# Altium PCB flying_spirit.PcbDoc
Units mm, origin at the board's own origin, x right, y up, seen from the top; angles counter-clockwise.
Board outline 97.88 x 97.88 mm, 2 copper layers (Top Layer, Bottom Layer); 70 components, 47 nets, 243 pads, 79 vias.
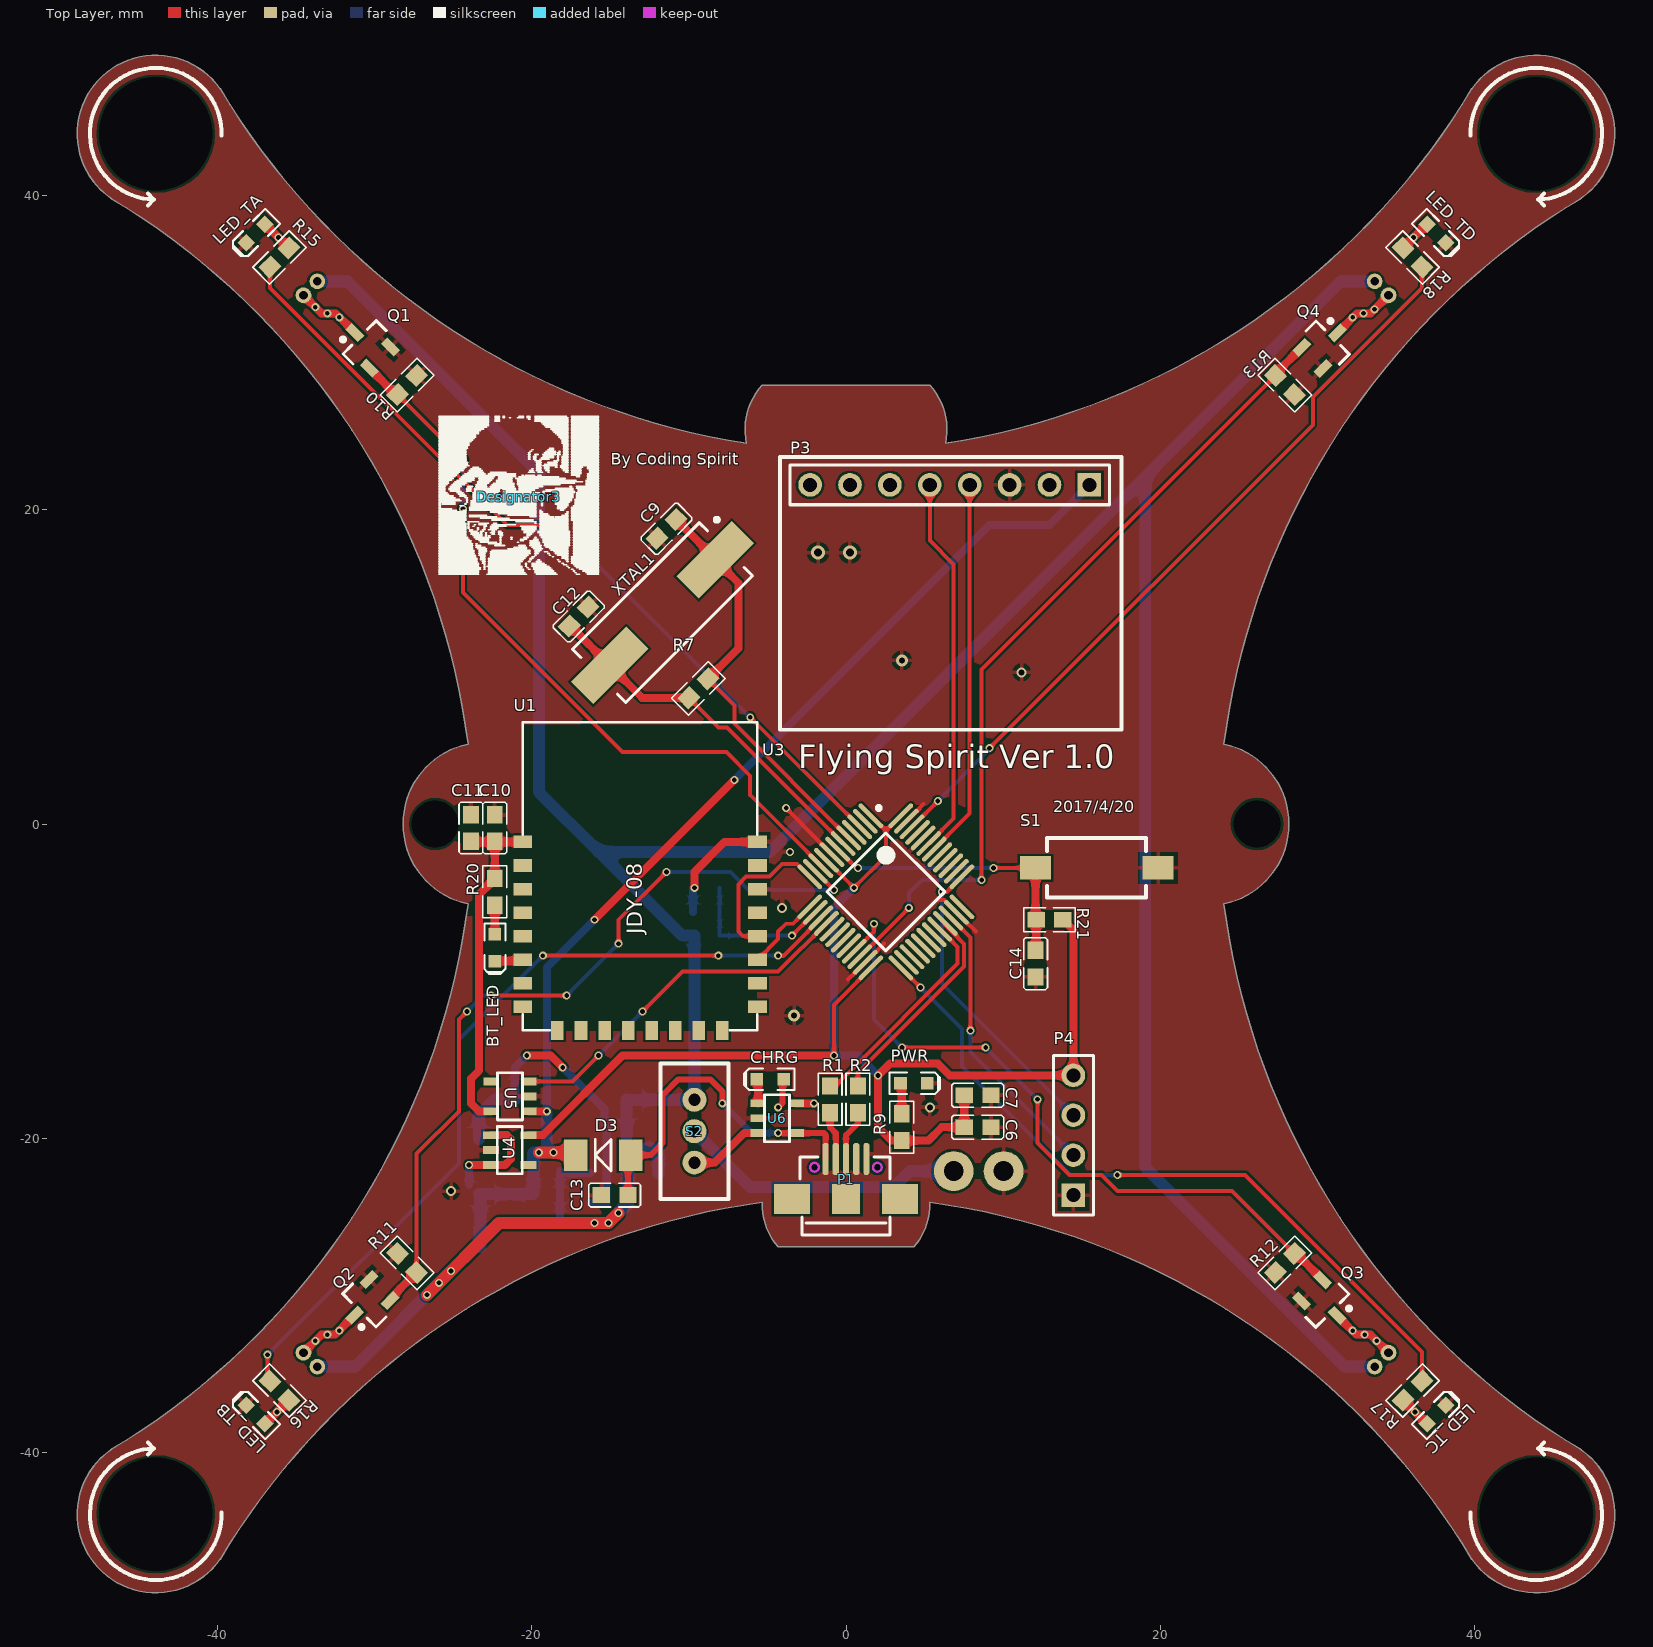
[diagram p0: Top Layer view]
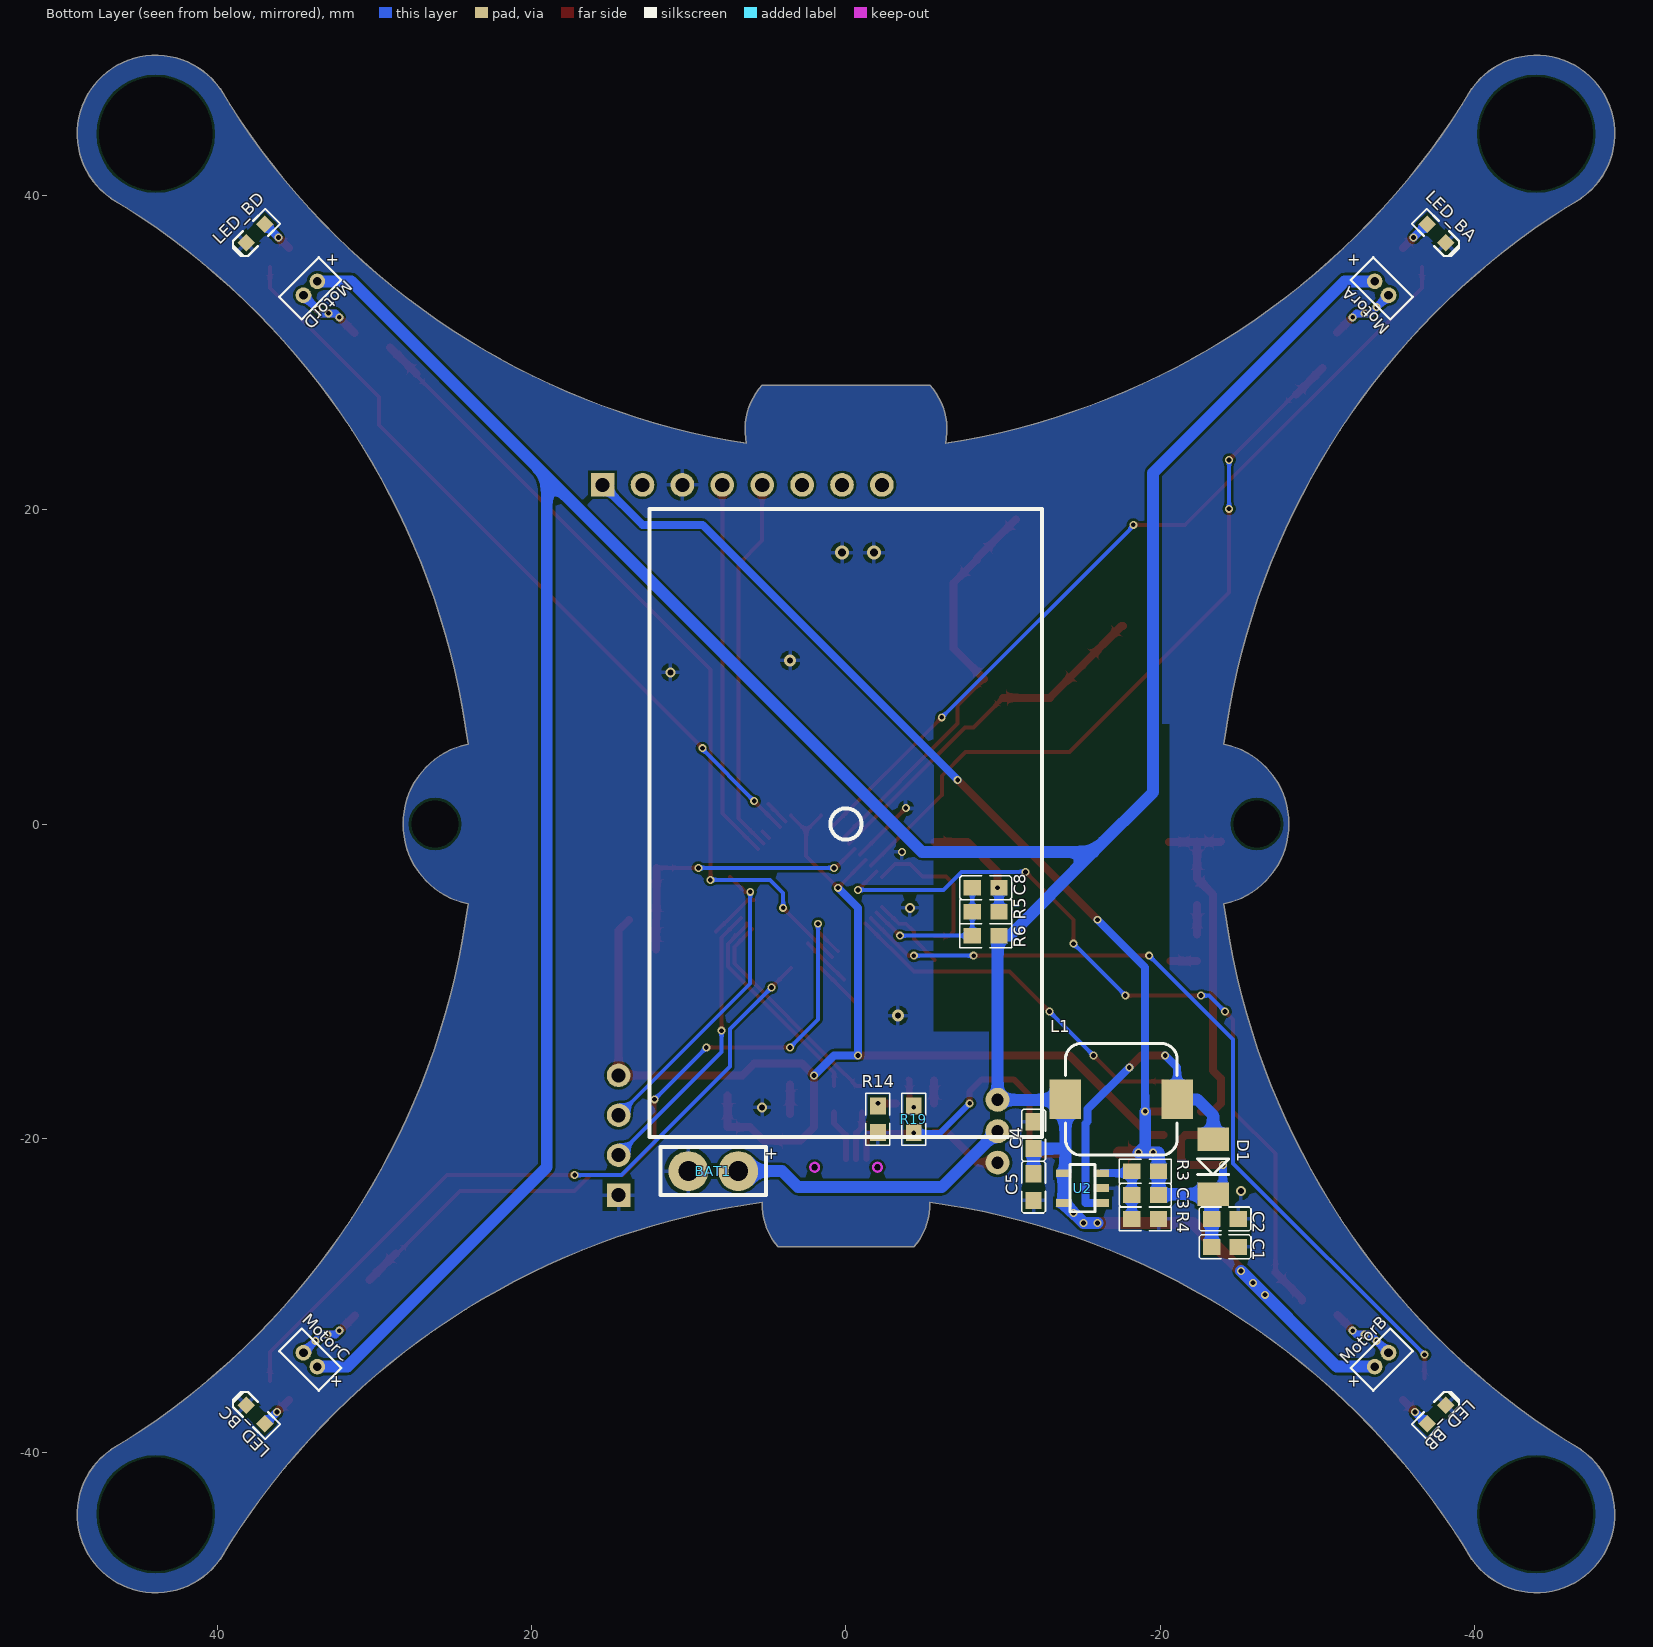
[diagram p1: Bottom Layer view, seen from below]
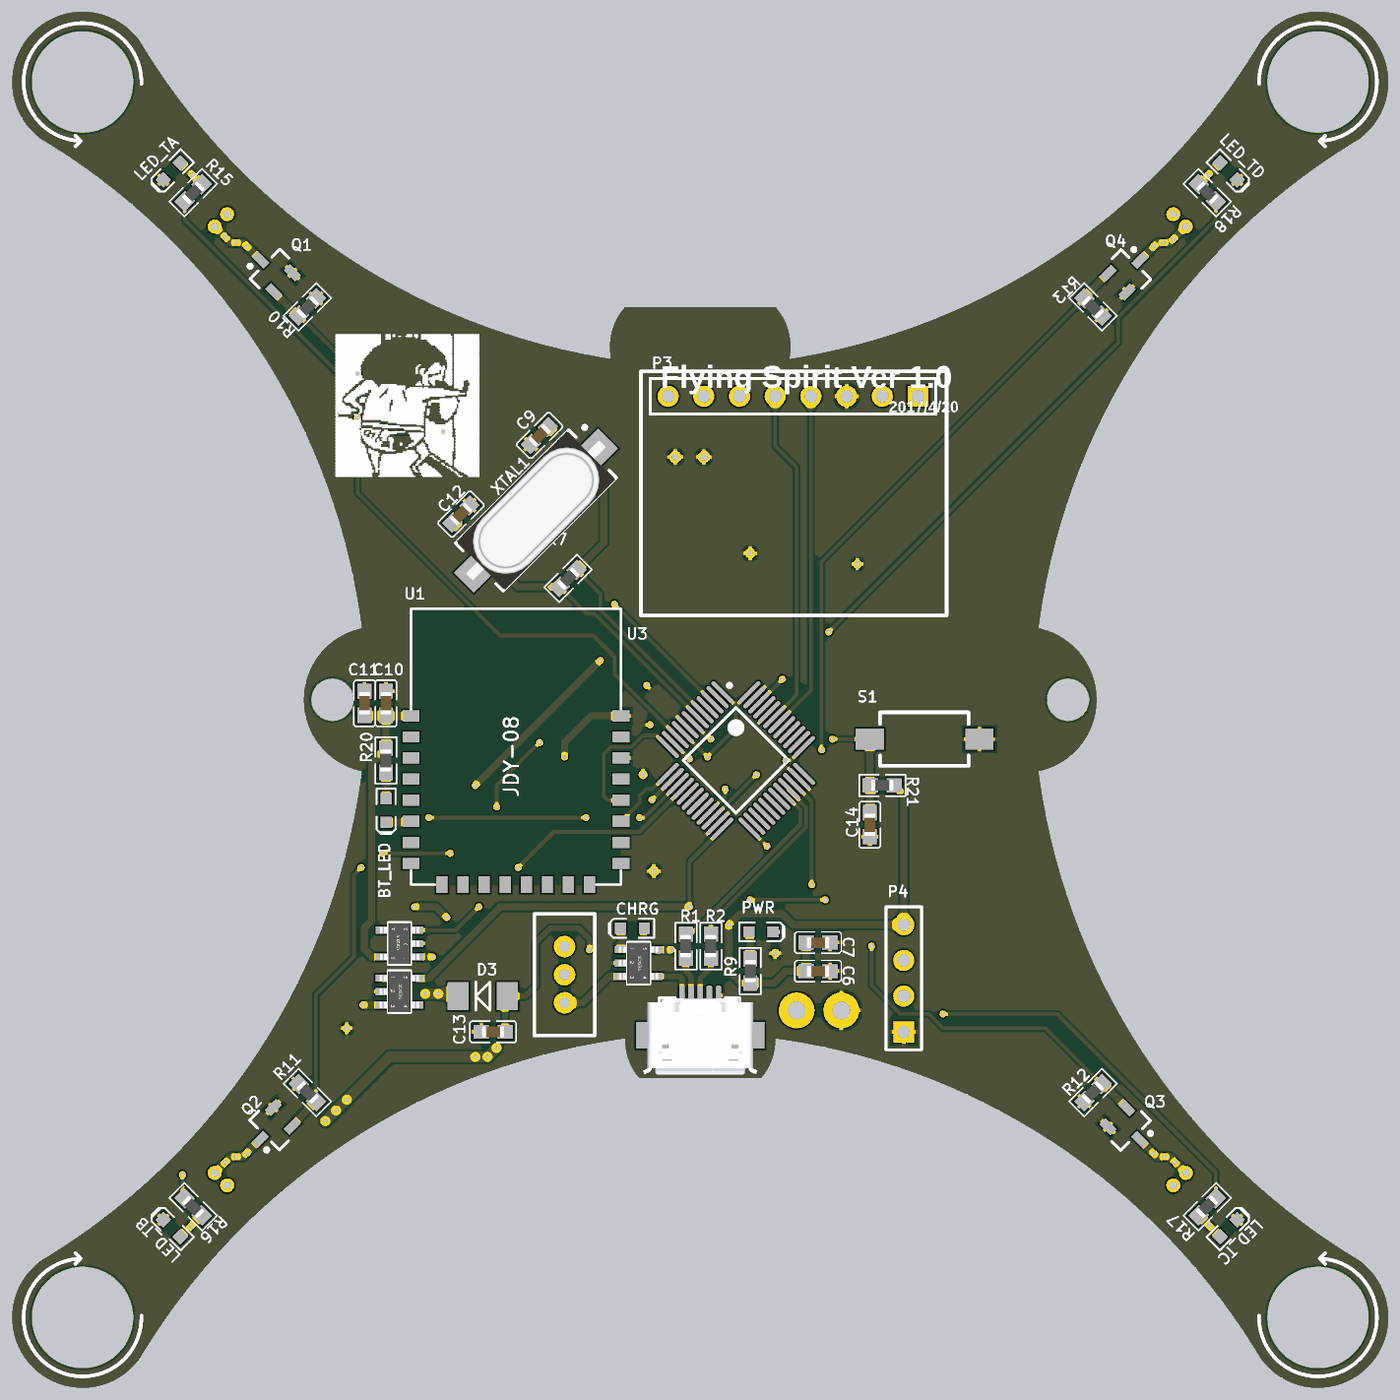
[diagram p2: 3D render of the assembled board from above, using the file's embedded part models]
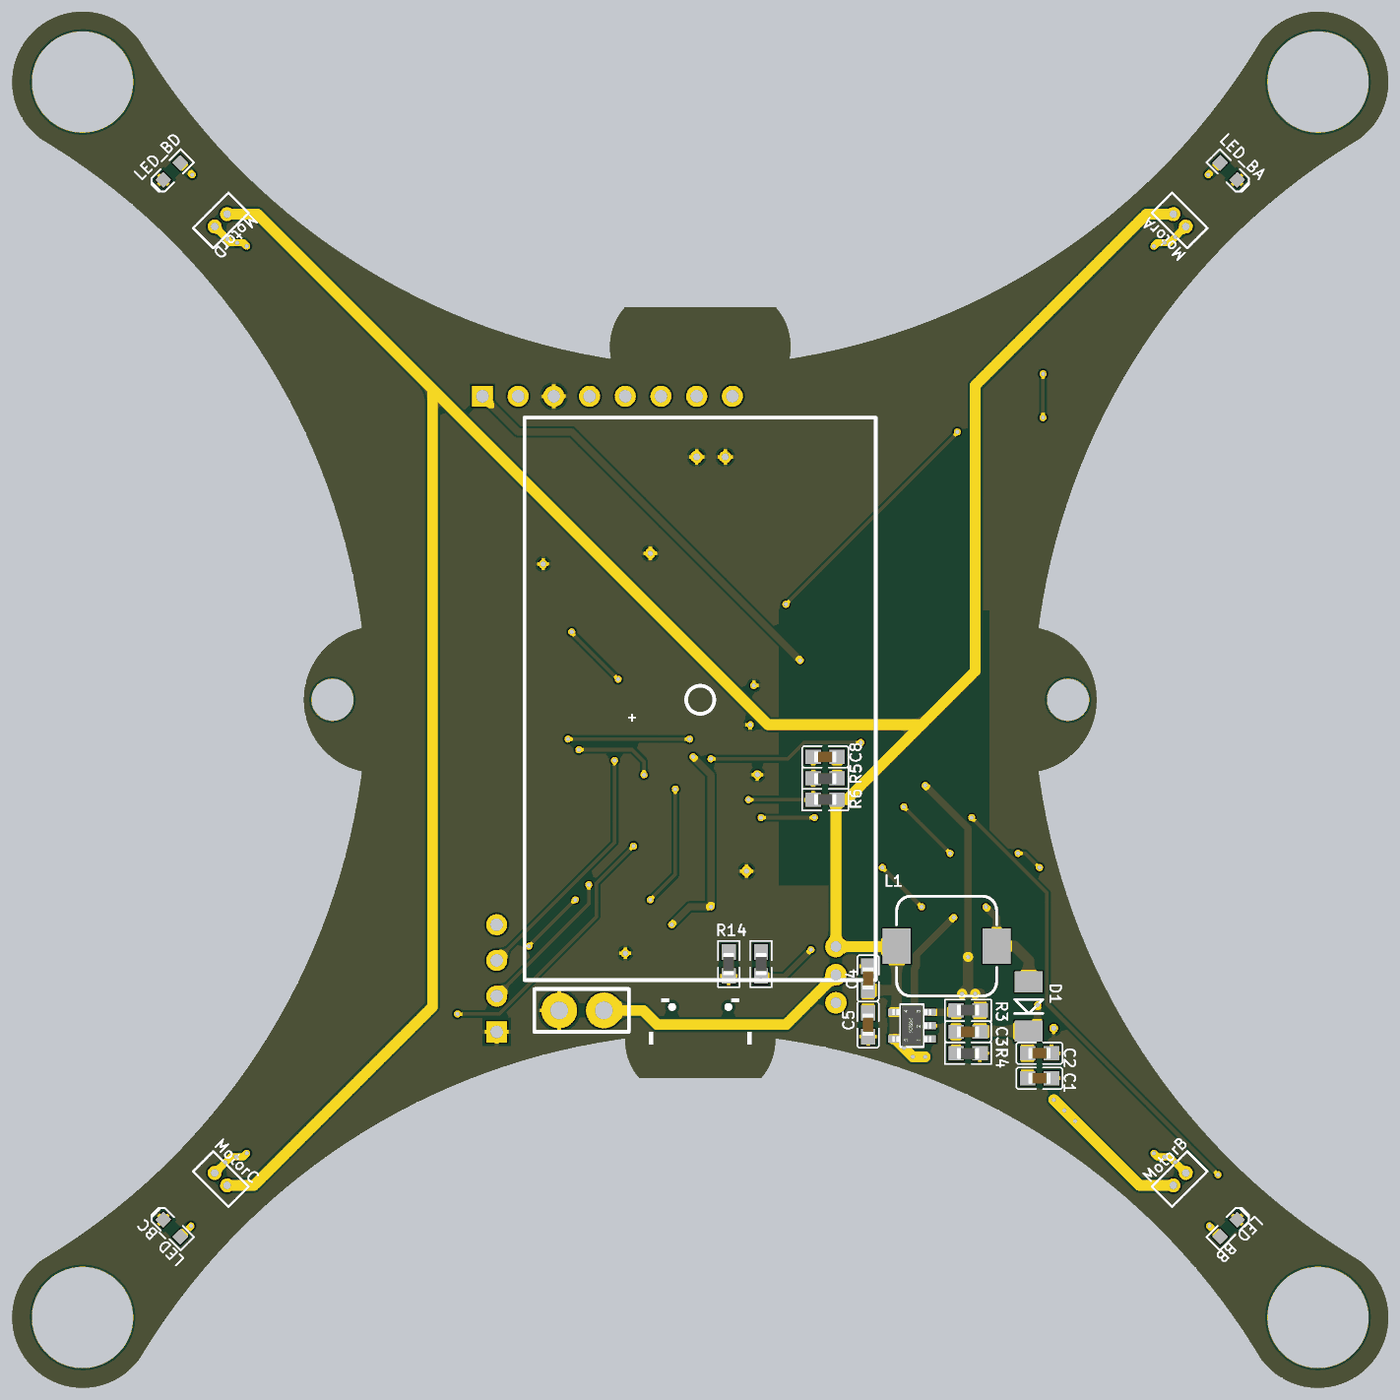
[diagram p3: 3D render of the assembled board from below, using the file's embedded part models]

## Layer stack, top to bottom
Top Solder: solder mask 0.0102, Solder Resist, Dk 3.5
Top Layer: signal copper 0.0356
Dielectric 1: dielectric 0.32, FR-4, Dk 4.8
Bottom Layer: signal copper 0.0356
Bottom Solder: solder mask 0.0102, Solder Resist, Dk 3.5

## Board outline
-39.846,-46.81 cw(c-43.942,-43.942) -46.81,-39.846 ccw(c-71.342,1.036) -24.059,-5.088 cw(c-22.997,0) -24.059,5.088 ccw(c-71.342,-1.036) -46.81,39.846 cw(c-43.942,43.942) -39.846,46.81 ccw(c1.036,71.342) -6.335,24.237 cw(c-2.212,25.109) -5.334,27.94 5.334,27.94 cw(c2.212,25.109) 6.335,24.237 ccw(c-1.036,71.342) 39.846,46.81 cw(c43.942,43.942) 46.81,39.846 ccw(c71.342,-1.036) 24.059,5.088 cw(c22.997,0) 24.059,-5.088 ccw(c71.342,1.036) 46.81,-39.846 cw(c43.942,-43.942) 39.846,-46.81 ccw(c-1.036,-71.342) 5.339,-24.092 cw(c1.242,-24.215) 4.318,-26.924 -4.318,-26.924 cw(c-1.242,-24.215) -5.339,-24.092 ccw(c1.036,-71.342)

## Design rules (kind name [scope] priority, off if disabled: settings)
Clearance [All] p1: gap=0.152 except(0.127: Arc-SMDPad Arc-THPad)
HoleSize [All] p1: absolutevalues=TRUE maxlimit=7.62 minlimit=0.025 maxpercent=80.000 minpercent=20.000
MinimumSolderMaskSliver [All] p1: minsoldermaskwidth=0
PolygonConnect [All] p1: connectstyle=Relief reliefconductorwidth=0.254 reliefentries=4 polygonreliefangle="90 Angle" airgapwidth=0.254
RoutingVias [All] p1: holewidth=0.711 width=1.27 viastyle="Through Hole" minholewidth=0.305 minwidth=0.508 maxholewidth=0.711 maxwidth=1.27
SilkToSilkClearance [All] p1: silktosilkclearance=0
SilkToSolderMaskClearance [IsPad] p1: minsilkscreentomaskgap=0 clearancetoexposedcopper=TRUE
SolderMaskExpansion [All] p1: expansion=0.102
Width [All] p1: maxlimit=0.762 minlimit=0.254 preferedwidth=0.254
26 further rules are at their usual default settings.

## Classes and differential pairs
component class main: BAT1 BT_LED C1 C2 C3 C4 C5 C6 C7 C8 C9 C10 C11 C12 C13 C14 CHRG D1 D3 L1 P3 P4 PWR R3 R4 R5 R6 R7 R9 R14 R19 R20 R21 S1 S2 U2 U3 U4 U5 U6 XTAL1
component class other: LED_BA LED_BB LED_BC LED_BD LED_TA LED_TB LED_TC LED_TD MotorA MotorB MotorC MotorD P1 Q1 Q2 Q3 Q4 R1 R2 R10 R11 R12 R13 R15 R16 R17 R18 U1

## Components (designator, comment, footprint, x,y, rotation, side; value= is the part's Value field where it differs from the comment)
BAT1 "Header 2" "HDR1*2 battery" 6.858,-22.098 r0 bottom
BT_LED "LED3" LED_0603_RED -22.352,-7.874 r270 top
C1 "Cap Semi" C-0603 -24.13,-26.924 r180 bottom
C2 "Cap Semi" C-0603 -24.13,-25.146 r180 bottom
C3 "Cap Semi" C-0603 -19.05,-23.622 r180 bottom
C4 "Cap Semi" C-0603 -11.938,-19.812 r270 bottom
C5 "Cap Semi" C-0603 -11.938,-23.114 r90 bottom
C6 "Cap Semi" C-0603 8.382,-19.304 r0 top
C7 "Cap Semi" C-0603 8.382,-17.272 r0 top
C8 "Cap Semi" C-0603 -8.89,-4.064 r0 bottom
C9 "Cap" C-0603 -11.43,18.796 r225 top
C10 "Cap Semi" C-0603 -22.352,-0.254 r90 top
C11 "Cap Semi" C-0603 -23.876,-0.254 r90 top
C12 "Cap" C-0603 -17.018,13.208 r45 top
C13 "Cap Semi" C-0603 -14.732,-23.622 r180 top
C14 "Cap" C-0603 12.065,-8.89 r90 top
CHRG "LED3" LED_0603_RED -4.826,-16.256 r180 top
D1 "D Schottky" DIODE-1206 -23.368,-20.066 r270 bottom
D3 "D Schottky" DIODE-1206 -13.716,-21.082 r180 top
Designator3 "Comment" Logo -20.828,20.828 r0 top
L1 "Inductor" L-SMD-7 -17.526,-17.526 r180 bottom
LED_BA "LED3" LED_0603_RED -37.592,37.592 r225 bottom
LED_BB "LED3" LED_0603_RED -37.592,-37.592 r135 bottom
LED_BC "LED3" LED_0603_RED 37.592,-37.592 r45 bottom
LED_BD "LED3" LED_0603_RED 37.592,37.592 r315 bottom
LED_TA "LED3" LED_0603_RED -37.592,37.592 r225 top
LED_TB "LED3" LED_0603_RED -37.592,-37.592 r135 top
LED_TC "LED3" LED_0603_RED 37.592,-37.592 r45 top
LED_TD "LED3" LED_0603_RED 37.592,37.592 r315 top
MotorA "Header 2" "HDR2 1.25mm" -33.655,34.544 r225 bottom
MotorB "Header 2" "HDR2 1.25mm" -33.655,-34.544 r135 bottom
MotorC "Header 2" "HDR2 1.25mm" 33.655,-34.544 r45 bottom
MotorD "Header 2" "HDR2 1.25mm" 33.655,34.544 r315 bottom
P1 "USB" USB_MICRO_M 0,-23.876 r0 top locked
P3 "gy-86" HDR1X8 15.494,21.59 r180 top
P4 "SW" HDR1X4 14.478,-23.622 r90 top
PWR "LED3" LED_0603_RED 4.318,-16.51 r0 top
Q1 "SI2302" SI2302 -30.48,30.48 r135 top
Q2 "SI2302" SI2302 -30.48,-30.48 r225 top
Q3 "SI2302" SI2302 30.48,-30.48 r315 top
Q4 "SI2302" SI2302 30.48,30.48 r45 top
R1 "Res2" R-0603 -1.016,-17.526 r90 top
R2 "Res2" R-0603 0.762,-17.526 r90 top
R3 "Res2" R-0603 -19.05,-22.098 r180 bottom
R4 "Res2" R-0603 -19.05,-25.146 r0 bottom
R5 "Res2" R-0603 -8.89,-7.112 r180 bottom
R6 "Res2" R-0603 -8.89,-5.588 r0 bottom
R7 "Res2" R-0603 -9.398,8.636 r225 top
R9 "Res2" R-0603 3.556,-19.304 r270 top
R10 "Res2" R-0603 -27.94,27.94 r225 top
R11 "Res2" R-0603 -27.94,-27.94 r315 top
R12 "Res2" R-0603 27.94,-27.94 r45 top
R13 "Res2" R-0603 27.94,27.94 r135 top
R14 "Res2" R-0603 -2.032,-18.796 r90 bottom
R15 "Res2" R-0603 -36.068,36.068 r225 top
R16 "Res2" R-0603 -36.068,-36.068 r135 top
R17 "Res2" R-0603 36.068,-36.068 r45 top
R18 "Res2" R-0603 36.068,36.068 r315 top
R19 "Res2" R-0603 -4.318,-18.796 r270 bottom
R20 "Res2" R-0603 -22.352,-4.318 r90 top
R21 "Res2" R-0603 12.954,-6.096 r0 top
S1 "SW-PB_1" SW-2-6*3 16.002,-2.794 r0 top
S2 "SW SPDT" "SW-SPDT 2mm" -9.652,-19.558 r270 top
U1 "BlueTooth" BLE_CC2541 -13.462,-3.81 r90 top
U2 "LM27313" SOT23-5 -16.256,-24.13 r270 bottom
U3 "STM32F103CBT6" STM-LQFP48_M 2.54,-4.318 r315 top locked
U4 "SPX5205" SOT23-5 -22.606,-19.812 r90 top
U5 "SPX5205" SOT23-5 -20.193,-18.288 r270 top
U6 "LTC4054" SOT23-5 -5.588,-17.78 r90 top
XTAL1 "XTAL" XTAL-QC49/SMD -11.684,13.462 r225 top

## Footprints (in the part's own frame and the unit in brackets; to place one, negate y for a bottom-side part, rotate by r counter-clockwise, add the part's x,y. Pads: shape width x height; smd on the part's side, far side on the other; paste and mask are expansions set on the pad)
BLE_CC2541 [mm]
  rect 0.8x1.2 smd: 1(2.667,7.112) 2(1.167,7.112) 3(-0.333,7.112) 4(-1.833,7.112) 5(-3.333,7.112) 6(-4.833,7.112) 7(-6.333,7.112) 8(-7.833,7.112) 17(-7.833,-7.823) 18(-6.333,-7.823) 19(-4.833,-7.823) 20(-3.333,-7.823) 21(-1.833,-7.823) 22(-0.333,-7.823) 23(1.167,-7.823) 24(2.667,-7.823)
  rect 1.2x0.8 smd: 9(-9.333,4.91) 10(-9.333,3.41) 11(-9.333,1.91) 12(-9.333,0.41) 13(-9.333,-1.09) 14(-9.333,-2.59) 15(-9.333,-4.09) 16(-9.333,-5.59)
  silkscreen extent -9.33,-7.82 10.28,7.11
C-0603 [mm]
  rect 1.1x1 smd: 1(-0.85,0) 2(0.85,0)
  silkscreen extent -1.65,-0.76 1.65,0.76, body extent -0.8,-0.4 0.8,0.4, height 0.6
DIODE-1206 [mm] "玻璃封装二极管"
  rect 1.5x2 smd: 1(0,0) 2(3.5,0)
  silkscreen extent 1.25,-1 2.25,1
"HDR1*2 battery" [mm]
  round 2.54 hole 1.27: 1(0,0) 2(3.175,0)
  silkscreen extent -1.78,-1.52 4.95,1.52
HDR1X4 [mm] "Connector; Header; 4 Position"
  rect 1.5x1.5 hole 0.9: 1(0,0)
  round 1.5 hole 0.9: 2(2.54,0) 3(5.08,0) 4(7.62,0)
  silkscreen extent -1.27,-1.27 8.89,1.27
HDR1X8 [mm] "Connector; Header; 8 Position"
  rect 1.5x1.5 hole 0.9: 1(0,0)
  round 1.5 hole 0.9: 2(2.54,0) 3(5.08,0) 4(7.62,0) 5(10.16,0) 6(12.7,0) 7(15.24,0) 8(17.78,0)
  silkscreen extent -1.27,-1.27 19.05,1.27
"HDR2 1.25mm" [mm]
  round 1 hole 0.55: 1(0,0) 2(1.25,0)
  silkscreen extent -1.14,-1.02 2.41,1.02
L-SMD-7 [mm] "贴片电感7*7"
  rect 2x2.5 smd: 1(-3.556,0) 2(3.556,0)
  silkscreen extent -3.56,-3.56 3.56,3.56, body extent -3.56,-3.56 3.56,3.56, height 4
LED_0603_RED [mm]
  rect 0.8x0.8 smd: 1(-0.85,0) 2(0.85,0)
  Top Layer pour cut-out: -0.5,0.5 0.5,0.5 0.5,-0.5 -0.5,-0.5
  silkscreen extent -1.55,-0.67 1.68,0.67, body extent -0.8,-0.4 0.8,0.4, height 0.75
Logo [mm]
  silkscreen extent -5.08,-4.93 5.08,5.13
R-0603 [mm]
  rect 1.1x1 smd: 1(-0.85,0) 2(0.85,0)
  silkscreen extent -1.65,-0.76 1.65,0.76, body extent -0.8,-0.38 0.8,0.42, height 0.38
SI2302 [mm]
  rect 1.15x0.6 smd: 1(-1.128,0.934) 2(-1.128,-0.966) 3(1.122,-0.016)
  silkscreen extent -0.2,-1.52 1.47,1.48, body extent -0.7,-1.52 0.7,1.48, height 1.1
SOT23-5 [mm]
  rect 0.5x1 smd: 1(0,0) 2(-0.95,0) 3(-1.9,0) 4(-1.9,-2.4) 5(0,-2.4)
  silkscreen extent -2.45,-2 0.55,-0.4, body extent -2.4,-2.6 0.5,0.2, height 1.09
STM-LQFP48_M [mm] "QFP, 48-Leads, Body 7x7mm, Pitch 0.5mm, IPC Low Density"
  oval 2.1x0.3 smd: 1(-4.1,2.75) 2(-4.1,2.25) 3(-4.1,1.75) 4(-4.1,1.25) 5(-4.1,0.75) 6(-4.1,0.25) 7(-4.1,-0.25) 8(-4.1,-0.75) 9(-4.1,-1.25) 10(-4.1,-1.75) 11(-4.1,-2.25) 12(-4.1,-2.75) 25(4.1,-2.75) 26(4.1,-2.25) 27(4.1,-1.75) 28(4.1,-1.25) 29(4.1,-0.75) 30(4.1,-0.25) 31(4.1,0.25) 32(4.1,0.75) 33(4.1,1.25) 34(4.1,1.75) 35(4.1,2.25) 36(4.1,2.75)
  oval 0.3x2.1 smd: 13(-2.75,-4.1) 14(-2.25,-4.1) 15(-1.75,-4.1) 16(-1.25,-4.1) 17(-0.75,-4.1) 18(-0.25,-4.1) 19(0.25,-4.1) 20(0.75,-4.1) 21(1.25,-4.1) 22(1.75,-4.1) 23(2.25,-4.1) 24(2.75,-4.1) 37(2.75,4.1) 38(2.25,4.1) 39(1.75,4.1) 40(1.25,4.1) 41(0.75,4.1) 42(0.25,4.1) 43(-0.25,4.1) 44(-0.75,4.1) 45(-1.25,4.1) 46(-1.75,4.1) 47(-2.25,4.1) 48(-2.75,4.1)
  silkscreen extent -4.22,-2.65 2.65,3.57, body extent -3.5,-3.5 3.5,3.5, height 1.6
SW-2-6*3 [mm]
  rect 2x1.5 smd: 1(-3.937,0) 2(3.863,0)
  silkscreen extent -3.21,-1.9 3.09,1.9, body extent -4,-1.94 3.89,1.91, height 2.5
"SW-SPDT 2mm" [mil]
  round 60 hole 30.68: 1(-78.74,0) 2(0,0) 3(78.74,0)
  silkscreen extent -170,-85 170,85
USB_MICRO_M [mm]
  oct 0.4x2.036 smd: 1(-1.3,2.54) 2(-0.65,2.54) 3(0,2.54) 4(0.65,2.54) 5(1.3,2.54)
  rect 2.286x1.9 smd: 6(3.429,0) 7(-3.429,0)
  rect 1.8x1.9 smd: 8(0,0)
  Keep-Out Layer board cut-out: 2,1.743 1.893,1.764 1.802,1.825 1.741,1.916 1.72,2.023 1.72,2.023 1.741,2.13 1.802,2.221 1.893,2.282 2,2.303 2,2.303 2.107,2.282 2.198,2.221 2.259,2.13 2.28,2.023 2.28,2.023 2.259,1.916 2.198,1.825 2.107,1.764 2,1.743
  Keep-Out Layer board cut-out: -2,1.743 -2.107,1.764 -2.198,1.825 -2.259,1.916 -2.28,2.023 -2.28,2.023 -2.259,2.13 -2.198,2.221 -2.107,2.282 -2,2.303 -2,2.303 -1.893,2.282 -1.802,2.221 -1.741,2.13 -1.72,2.023 -1.72,2.023 -1.741,1.916 -1.802,1.825 -1.893,1.764 -2,1.743
  Keep-Out Layer circle w0.15: c-2,2.023 r0.28
  Keep-Out Layer circle w0.15: c2,2.023 r0.28
  silkscreen extent -2.92,-2.29 2.79,2.67, body extent -4.1,-2.78 4.1,2.65, height 2.75
XTAL-QC49/SMD [mm]
  rect 5x2 smd: 1(-4.75,0) 2(4.75,0)
  silkscreen extent -6.75,-2.4 5.7,2.4, body extent -6.7,-2.46 6.7,2.44, height 4

## Part data
BAT1 MotorA MotorB MotorC MotorD: "Header, 2-Pin"
BT_LED CHRG LED_BA LED_BB LED_BC LED_BD LED_TA LED_TB LED_TC LED_TD PWR: "Typical BLUE SiC LED"
C1 C2 C3 C4 C5 C6 C7 C8 C10 C11 C13: "Capacitor (Semiconductor SIM Model)"
C9 C12 C14: library part "Cap Semi", "Capacitor (Semiconductor SIM Model)"
D1 D3: "Schottky Diode"
P3: library part "Header 8", "Header, 8-Pin"
P4: library part "Header 4", "Header, 4-Pin"
R1 R2 R3 R4 R5 R6 R7 R9 R10 R11 R12 R13 R14 R15 R16 R17 R18 R19 R20 R21: "Resistor"
S1: "Switch"
U1: library part CC2541-MOD
U3: "ARM Cortex-M3 32-bit MCU, 128 KB Flash, 20 KB Internal RAM, 37 I/Os, 48-pin LQFP, -40 to 85 degC, Tray"

## Free pads (board coordinates)
  round 1.524 hole 7.2: 0(-43.942,-43.942) 0(-43.942,43.942) 0(43.942,-43.942) 0(43.942,43.942)
  round 1.524 hole 3: 0(-26.162,0) 0(26.162,0)

## Via types
v1: diameter 0.508, hole 0.305, Top Layer to Bottom Layer, 71 vias
v2: diameter 0.635, hole 0.381, Top Layer to Bottom Layer, 4 vias
v3: diameter 0.762, hole 0.381, Top Layer to Bottom Layer, 2 vias
v4: diameter 0.889, hole 0.508, Top Layer to Bottom Layer, 2 vias

## Nets (pads, with @x,y where several pads share a name; then routed paths per layer and width w, separated by ;. In a path a pad name is that pad's centre, name@x,y a point inside that pad or via, vN(x,y) a via of type N, cw(c..) or ccw(c..) an arc to the next point about the centre after c; other vN are vias at no path point)
3.3V: C6.1 C7.1 P4.4 R9.2 R21.2 U3.1 U3.9 U3.24 U3.48 U4.5 | length 87.1
  Top Layer w0.254: U3.9 v1@0.513,-4.059 ; v1(-0.762,-14.732) -0.762,-11.509 U3.24 ; v1(0.508,-4.064) v1@0.513,-4.059 ; U3.1 2.54,-0.429 ; U3.48 2.54,-0.429 ; v1@0.513,-4.059 2.54,-2.032 2.54,-0.429
  Top Layer w0.508: U4.5 -19.304,-19.812 -14.224,-14.732 v1(-0.762,-14.732) ; C7.1 C6.1 6.096,-19.304 5.246,-20.154 R9.2 2.882,-20.154 2.032,-19.304 v1(2.032,-16.002) 2.794,-15.24 5.842,-15.24 6.604,-16.002 P4.4 14.478,-6.77 R21.2
  Bottom Layer w0.508: v1(0.508,-4.064) -0.762,-5.334 v1(-0.762,-14.732) 0.762,-14.732 v1(2.032,-16.002)
3.3V_BT: C10.1 C11.1 R20.2 U1.1 U5.5 | length 22.1
  Top Layer w0.508: C11.1 -23.837,-1.143 C10.1@-22.352,-1.143 ; U5.5 -23.368,-18.288 -23.876,-17.78 -23.876,-16.215 -23.368,-15.707 -23.368,-4.484 R20.2 C10.1@-22.352,-1.143 ; C10.1 C10.1@-22.352,-1.143 ; U1.1 C10.1@-22.352,-1.143
5V: C1.1 C2.1 C3.2 D1.2 D3.2 P3.1 R3.2 U4.1 U4.3 U5.1 | length 79.9
  Top Layer w0.508: v1(-23.998,-21.712) U4.3 -21.712,-21.712 -21.336,-21.336 -21.336,-20.066 -21.59,-19.812 U4.1 ; U5.1 v1(-19.05,-18.288) ; v1(-16.002,-6.096) v1(-7.112,2.794)
  Top Layer w0.762: v1(-19.558,-20.916) D3.2@-17.382,-20.916
  Bottom Layer w0.508: D1.2@-23.998,-22.936 v1(-23.998,-21.712) ; C3.2@-19.956,-23.566 C3.2@-19.9,-23.51 ; v1(-19.05,-18.288) -19.05,-9.144 v1(-16.002,-6.096) ; v1(-7.112,2.794) 9.144,19.05 12.954,19.05 P3.1
  Bottom Layer w0.762: D1.2 C3.2@-19.956,-23.566 ; C1.1 C2.1 D1.2@-23.28,-23.654 ; C3.2@-19.9,-23.51 R3.2 -19.9,-20.916 v1(-18.63,-20.916) -19.05,-20.496 v1(-19.05,-18.288)
BAT3.7V: C4.2 C5.2 L1.1 MotorA.1 MotorB.1 MotorC.1 MotorD.1 R5.2 S2.1 U2.4 U2.5 | length 234.2
  Top Layer w0.762: v1@-26.665,-29.977 -22.088,-25.4 v1(-15.126,-25.4) v1(-14.491,-24.765)
  Bottom Layer w0.762: MotorB.1 -31.242,-34.544 v1(-25.146,-28.448) ; MotorA.1 -31.75,34.544 -19.558,22.352 -19.558,2.032 -15.748,-1.778 ; v1(-16.002,-25.4) v1(-15.126,-25.4) U2.5 U2.4 ; U2.4@-13.97,-22.116 L1.1 ; L1.1@-13.938,-17.558 S2.1 -9.652,-7.112 -10.414,-7.112 -15.748,-1.778 ; -13.882,-20.662 C4.2 C5.2 ; MotorC.1 31.75,-34.544 19.05,-21.844 19.05,22.098 ; MotorD.1 31.496,34.544 19.05,22.098 ; -15.748,-1.778 -4.826,-1.778 19.05,22.098
  other v1: -26.67,-29.972 -25.908,-29.21
BAT_CHECK: C8.2 R5.1 R6.2 U3.14 | length 9.8
  Top Layer w0.254: v1(-3.436,-7.112) U3.14
  Bottom Layer w0.254: C8.2 R5.1 v1(-3.436,-7.112)
BT_EN: U3.16 U5.3 | length 23.1
  Top Layer w0.254: U5.3 -17.404,-16.388 v1(-15.748,-14.732) ; v1(-12.954,-11.938) -10.414,-9.398 -4.318,-9.398 U3.16@-1.253,-6.333
  Bottom Layer w0.254: v1(-15.748,-14.732) v1(-12.954,-11.938)
BT_LED: BT_LED.2 U1.6 | length 1.7
  Top Layer w0.508: BT_LED.2 U1.6@-20.655,-8.724
CHRG_LED: CHRG.2 U6.1 | length 1.4
  Top Layer w0.508: U6.1 CHRG.2@-5.588,-16.344
GND: BAT1.2 C1.2 C2.2 C4.1 C5.1 C6.2 C7.2 C8.1 C9.2 C10.2 C11.2 C12.2 C13.2 C14.1 LED_BA.2 LED_BB.2 LED_BC.2 LED_BD.2 LED_TA.2 LED_TB.2 LED_TC.2 LED_TD.2 P1.5 P3.3 P4.1 PWR.2 Q1.2 Q2.2 Q3.2 Q4.2 R4.1 R6.1 R10.1 R11.1 R12.1 R13.1 R14.1 S1.2 U1.22 U1.24 U2.2 U3.8 U3.23 U3.35 U3.44 U3.47 U4.2 U5.2 U6.2 | length 20.1
  Top Layer w0.254: v1(-3.81,1.016) -2.794,0 ; -2.794,-0.045 U3.8 ; 0.134,-9.906 U3.23 2.42,-7.62 ; U3.47 4.947,1.271 ; U3.44 U3.44@5.312,-0.486 ; 5.85,-4.826 5.875,-4.851 6.255,-4.851 U3.35 8.262,-6.858
  Top Layer w0.508: v1(-9.652,-4.064) -9.652,-3.048 -7.747,-1.143 U1.24
  Bottom Layer w0.508: R6.1 C8.1
  other v1: -3.556,-1.778
  other v2: -25.146,-23.368 5.334,-18.034 -4.064,-5.334 11.176,9.652
  other v3: -3.302,-12.192 3.556,10.414
  other v4: -1.778,17.272 0.254,17.272
IIC_SCL: P3.4 U3.42 | length 24.1
  Top Layer w0.254: U3.42 7.874,0.662 P3.4
IIC_SDA: P3.5 U3.43 | length 24.1
  Top Layer w0.254: U3.43 6.858,0.354 6.858,16.51 5.334,18.034 P3.5
LEDA: R15.2 U3.3 | length 53.1
  Top Layer w0.254: R15.2 -36.669,34.129 -21.59,19.05 v1(-18.288,19.05) ; v1(-6.096,6.793) U3.3
  Bottom Layer w0.254: v1@-18.321,19.017 v1(-6.096,6.793)
LEDB: R16.2 U3.15 | length 52.9
  Top Layer w0.254: R16.2@-36.83,-35.306 v1(-36.83,-33.782) ; v1(-19.304,-8.382) v1(-8.128,-8.382) ; v1(-4.318,-8.382) -3.952,-8.382 -1.597,-6.027 U3.15
  Bottom Layer w0.254: v1(-36.83,-33.782) -24.647,-21.599 -24.647,-13.725 v1(-19.304,-8.382) ; v1(-8.128,-8.382) v1(-4.318,-8.382)
LEDC: R17.2 U3.25 | length 46.6
  Top Layer w0.254: U3.25 v1(4.747,-10.414) ; v1(17.272,-22.352) 25.4,-22.352 36.669,-33.621 R17.2
  Bottom Layer w0.254: v1(4.747,-10.414) 7.391,-13.058 7.391,-15.451 14.292,-22.352 v1(17.272,-22.352)
LEDD: R18.2 U3.46 | length 49
  Top Layer w0.254: U3.46 v1(5.842,1.459) ; v1(9.144,4.826) 29.718,25.4 29.718,27.178 36.669,34.129 R18.2
  Bottom Layer w0.254: v1(5.842,1.459) v1@9.144,4.761
NetBAT1_1: BAT1.1 S2.2 | length 18.4
  Bottom Layer w0.762: S2.2 -6.096,-23.114 3.048,-23.114 4.064,-22.098 BAT1.1
NetBT_LED_1: BT_LED.1 R20.1 | length 1.9
  Top Layer w0.508: BT_LED.1 R20.1
NetC3_1: C3.1 R3.1 R4.2 U2.3 | length 4.9
  Bottom Layer w0.508: R4.2 C3.1 R3.1 ; R3.1@-18.068,-22.23 U2.3
NetC9_1: C9.1 R7.1 U3.5 XTAL1.1 | length 26.4
  Top Layer w0.254: R7.1 -7.112,7.552 -7.112,6.395 U3.5
  Top Layer w0.508: C9.1 -8.325,16.893 XTAL1.1 -6.858,15.353 -6.858,11.176 R7.1
NetC12_1: C12.1 R7.2 U3.6 XTAL1.2 | length 23.2
  Top Layer w0.254: R7.2 -8.11,6.146 -7.57,6.146 U3.6
  Top Layer w0.508: C12.1 -17.546,12.607 XTAL1.2 -12.974,8.035 R7.2
NetCHRG_1: CHRG.1 R19.1 | length 1.9
  Top Layer w0.381: v1(-4.318,-18.034) -4.031,-17.747 -4.031,-16.311 CHRG.1
NetD1_1: D1.1 L1.2 U2.1 | length 20.8
  Top Layer w0.508: v1(-20.32,-14.732) -18.796,-14.732 v1(-18.034,-15.494)
  Bottom Layer w0.508: L1.2 -21.082,-15.494 v1(-20.32,-14.732) ; v1(-18.034,-15.494) -15.376,-18.152 -15.376,-18.944 -15.24,-19.081 -15.24,-24.13 U2.1
  Bottom Layer w0.762: D1.1 -23.368,-18.542 -22.352,-17.526 L1.2
NetLED_BA_1: LED_BA.1 LED_TA.1 R15.1 | length 3.4
  Top Layer w0.508: LED_TA.1 v1(-36.136,37.338) R15.1
  Bottom Layer w0.508: LED_BA.1 v1(-36.136,37.338)
NetLED_BB_1: LED_BB.1 LED_TB.1 R16.1 | length 3.2
  Top Layer w0.508: LED_TB.1 v1(-36.229,-37.431) R16.1
  Bottom Layer w0.508: LED_BB.1 v1(-36.229,-37.431)
NetLED_BC_1: LED_BC.1 LED_TC.1 R17.1 | length 3.2
  Top Layer w0.508: R17.1 v1(36.229,-37.431) LED_TC.1
  Bottom Layer w0.508: v1(36.229,-37.431) LED_BC.1
NetLED_BD_1: LED_BD.1 LED_TD.1 R18.1 | length 3.4
  Top Layer w0.508: R18.1 v1(36.136,37.338) LED_TD.1
  Bottom Layer w0.508: v1(36.136,37.338) LED_BD.1
NetMotorA_2: MotorA.2 Q1.3 | length 7.1
  Top Layer w0.508: MotorA.2 -33.391,32.512 -32.489,32.512 Q1.3
  Bottom Layer w0.508: MotorA.2@-34.539,33.638 MotorA.2 -33.391,32.512 -32.512,32.512 v1(-32.258,32.258)
  other v1: -33.02,32.512 -33.782,32.903
NetMotorB_2: MotorB.2 Q2.3 | length 7.1
  Top Layer w0.508: MotorB.2 -33.391,-32.512 -32.535,-32.512 Q2.3
  Bottom Layer w0.508: MotorB.2 -33.391,-32.512 -32.512,-32.512 v1(-32.258,-32.258)
  other v1: -33.782,-32.903 -33.02,-32.512
NetMotorC_2: MotorC.2 Q3.3 | length 7.1
  Top Layer w0.508: Q3.3 32.489,-32.512 33.391,-32.512 MotorC.2
  Bottom Layer w0.508: v1(32.258,-32.258) 32.512,-32.512 33.391,-32.512 MotorC.2 MotorC.2@34.539,-33.638
  other v1: 33.782,-32.903 33.02,-32.512
NetMotorD_2: MotorD.2 Q4.3 | length 7.1
  Top Layer w0.508: Q4.3 32.535,32.512 33.391,32.512 MotorD.2
  Bottom Layer w0.508: v1(32.258,32.258) 32.512,32.512 33.391,32.512 MotorD.2 MotorD.2@34.539,33.638
  other v1: 32.951,32.512 33.645,32.766
NetP1_2: P1.2 R1.1 | length 3.1
  Top Layer w0.381: R1.1 -1.016,-19.312 -0.65,-19.678 P1.2
NetP1_3: P1.3 R2.1 | length 3.3
  Top Layer w0.381: P1.3 0,-19.812 0.762,-19.05 R2.1
NetPWR_1: PWR.1 R9.1 | length 1.9
  Top Layer w0.508: R9.1 PWR.1@3.556,-16.598
NetR14_2: R14.2 U6.5 | length 1.2
  Top Layer w0.508: U6.5 v1(-2.032,-17.78)
NetS2_3: S2.3 U6.3 | length 4.8
  Top Layer w0.508: S2.3 -8.35,-21.558 -6.472,-19.68 U6.3
PWMA: Q1.1 R10.2 U3.10 | length 47.4
  Top Layer w0.254: R10.2 v1(-24.384,23.182) ; v1(-24.384,20.066) -24.384,14.732 -14.224,4.572 -7.62,4.572 -6.096,3.048 -6.096,1.843 U3.10
  Top Layer w0.508: Q1.1 R10.2@-28.66,27.339
  Bottom Layer w0.254: v1(-24.384,20.066) v1(-24.384,23.182)
PWMB: Q2.1 R11.2 U3.11 | length 50.5
  Top Layer w0.254: R11.2 -27.339,-20.989 -24.638,-18.288 -24.638,-12.446 v1(-24.13,-11.938) ; v1(-22.606,-10.922) v1(-17.78,-10.922) ; v1(-14.478,-7.62) -14.478,-6.096 v1(-11.43,-3.048) ; U3.11 v1(-0.762,-4.198)
  Top Layer w0.508: Q2.1 -29.022,-30.224 R11.2
  Bottom Layer w0.254: v1(-24.13,-11.938) -23.114,-10.922 v1(-22.606,-10.922) ; v1(-17.78,-10.922) v1(-14.478,-7.62) ; v1(-11.43,-3.048) -7.366,-3.048 -6.216,-4.198 v1(-0.762,-4.198)
PWMC: Q3.1 R12.2 U3.21 | length 45.3
  Top Layer w0.254: U3.21 1.778,-6.848 v1(1.778,-6.35) ; v1(3.556,-14.224) v1(8.89,-14.224) ; v1(12.192,-17.526) 12.192,-20.32 14.224,-22.352 16.256,-22.352 17.272,-23.368 24.57,-23.368 R12.2
  Top Layer w0.508: R12.2@28.66,-27.339 Q3.1
  Bottom Layer w0.254: v1(1.778,-6.35) 1.778,-12.446 v1(3.556,-14.224) ; v1(8.89,-14.224) v1(12.192,-17.526)
PWMD: Q4.1 R13.2 U3.22 | length 52.6
  Top Layer w0.254: U3.22 v1(3.999,-5.334) ; 8.611,9.813 8.611,-3.531 v1(8.636,-3.556) ; 8.636,9.838 R13.2
  Top Layer w0.508: R13.2@27.339,28.66 Q4.1
  Bottom Layer w0.254: v1(3.999,-5.334) 3.999,-4.383 4.826,-3.556 v1(8.636,-3.556)
RESET: C14.2 R21.1 S1.1 U3.7 | length 18.2
  Top Layer w0.254: U3.7 v1@0.662,-2.794 ; v1(9.398,-2.794) S1.1
  Top Layer w0.508: R21.1@12.065,-6.057 S1.1 ; C14.2@12.104,-8.001 R21.1
  Bottom Layer w0.254: v1(0.762,-2.794) v1(9.398,-2.794)
SWC: P4.3 U3.37 | length 19.4
  Top Layer w0.254: v1(6.096,-4.318) 6.429,-4.318 U3.37
  Bottom Layer w0.254: v1(6.096,-4.318) 6.096,-10.16 P4.3
SWD: P4.2 U3.34 | length 18.3
  Top Layer w0.254: U3.34 7.925,-7.228 v1(7.925,-13.157)
  Bottom Layer w0.254: v1(7.925,-13.157) 7.925,-14.529 P4.2
UART2_RX: U1.19 U3.13 | length 5
  Top Layer w0.254: U1.19 -4.318,-7.322 -4.318,-6.858 -3.81,-6.35 -3.381,-6.35 U3.13
UART2_TX: U1.20 U3.12 | length 9.8
  Top Layer w0.254: U1.20 -6.573,-7.143 -6.858,-6.858 -6.858,-3.856 -6.355,-3.353 -4.877,-3.353 -4.064,-2.54 -3.127,-2.54 U3.12
USB_5V: C13.1 D3.1 P1.1 R19.2 U6.4 | length 22
  Top Layer w0.381: C13.1 D3.1@-13.882,-21.248 ; D3.1 -12.446,-21.082 -11.684,-20.32 -11.684,-17.272 -10.668,-16.256 -8.636,-16.256 -7.874,-17.018 v1(-7.874,-17.78) ; v1(-4.318,-19.68) U6.4 -1.402,-19.68 -1.3,-19.782 P1.1
  Bottom Layer w0.381: v1(-7.874,-17.78) -5.974,-19.68 v1(-4.318,-19.68)
USB_D+: R2.2 U3.33 | length 13.7
  Top Layer w0.254: R2.2 0.762,-15.815 7.518,-9.058 7.518,-7.628 6.273,-6.383 U3.33
USB_D-: R1.2 U3.32 | length 14
  Top Layer w0.254: R1.2 -0.674,-16.676 -0.017,-16.019 -0.017,-16.01 0.146,-15.847 0.155,-15.847 7.112,-8.89 7.112,-7.829 U3.32
pads on no net: P1.4 P1.6 P1.7 P1.8 P3.2 P3.6 P3.7 P3.8 U1.2 U1.3 U1.4 U1.5 U1.7 U1.8 U1.9 U1.10 U1.11 U1.12 U1.13 U1.14 U1.15 U1.16 U1.17 U1.18 U1.21 U1.23 U3.2 U3.4 U3.17 U3.18 U3.19 U3.20 U3.26 U3.27 U3.28 U3.29 U3.30 U3.31 U3.36 U3.38 U3.39 U3.40 U3.41 U3.45 U4.4 U5.4

## Polygon pours and split planes (outlines as drawn)
GND on Top Layer "Top Layer-GND" (solid, remove dead copper, pour order 10): -39.846,-46.81 cw(c-43.942,-43.942) -46.81,-39.846 ccw(c-71.342,1.036) -24.059,-5.088 cw(c-22.997,0) -24.059,5.088 ccw(c-71.342,-1.036) -46.81,39.846 cw(c-43.942,43.942) -39.846,46.81 ccw(c1.036,71.342) -6.335,24.237 cw(c-2.212,25.109) -5.334,27.94 5.334,27.94 cw(c2.212,25.109) 6.335,24.237 ccw(c-1.036,71.342) 39.846,46.81 cw(c43.942,43.942) 46.81,39.846 ccw(c71.342,-1.036) 24.059,5.088 cw(c22.997,0) 24.059,-5.088 ccw(c71.342,1.036) 46.81,-39.846 cw(c43.942,-43.942) 39.846,-46.81 ccw(c-1.036,-71.342) 5.339,-24.092 cw(c1.242,-24.215) 4.318,-26.924 -4.318,-26.924 cw(c-1.242,-24.215) -5.339,-24.092 ccw(c1.036,-71.342)
GND on Bottom Layer "Bottom Layer-GND" (solid, remove dead copper, pour order 12): -39.846,-46.81 cw(c-43.942,-43.942) -46.81,-39.846 ccw(c-71.342,1.036) -24.059,-5.088 cw(c-22.997,0) -24.059,5.088 ccw(c-71.342,-1.036) -46.81,39.846 cw(c-43.942,43.942) -39.846,46.81 ccw(c1.036,71.342) -6.335,24.237 cw(c-2.212,25.109) -5.334,27.94 5.334,27.94 cw(c2.212,25.109) 6.335,24.237 ccw(c-1.036,71.342) 39.846,46.81 cw(c43.942,43.942) 46.81,39.846 ccw(c71.342,-1.036) 24.059,5.088 cw(c22.997,0) 24.059,-5.088 ccw(c71.342,1.036) 46.81,-39.846 cw(c43.942,-43.942) 39.846,-46.81 ccw(c-1.036,-71.342) 5.339,-24.092 cw(c1.242,-24.215) 4.318,-26.924 -4.318,-26.924 cw(c-1.242,-24.215) -5.339,-24.092 ccw(c1.036,-71.342)

## Keep-outs
Mechanical 1:
  the board outline again, w0.254

## Other copper
Top Layer:
  pour cut-out: -20.574,6.35 -5.653,6.35 -5.653,-13.143 -5.588,-13.208 -20.574,-13.208
Bottom Layer:
  pour cut-out: -20.574,6.35 -5.588,6.35 -5.588,-13.208 -20.574,-13.208

## Silkscreen, mask and mechanical layers (free items; w line width, h text height)
Top Overlay:
  lines w0.254: -44.45,-40.132 -44.069,-39.751 ; -44.45,-39.37 -44.069,-39.751 ; -44.45,39.37 -44.069,39.751 ; -44.45,40.132 -44.069,39.751 ; -39.751,-43.815 cw(c-43.942,-43.942) -44.069,-39.751 ; -39.751,43.815 ccw(c-43.942,43.942) -44.069,39.751 ; 39.751,-43.815 ccw(c43.942,-43.942) 44.069,-39.751 ; 39.751,43.815 cw(c43.942,43.942) 44.069,39.751 ; 44.45,-40.132 44.069,-39.751 ; 44.45,-39.37 44.069,-39.751 ; 44.45,39.37 44.069,39.751 ; 44.45,40.132 44.069,39.751 ; -4.217,6 17.526,6 17.526,23.368 -4.217,23.368 -4.217,6
  text "By Coding Spirit" at -14.986,22.606 h1.27
  text "Flying Spirit Ver 1.0" at -3.048,3.048 h2.54
  text "2017/4/20" at 13.208,0.508 h1.27
Bottom Overlay:
  circle w0.254: c0,0 r1
  lines w0.254: -12.487,20.061 -12.487,-19.939 12.513,-19.939 12.513,20.061 ; -12.487,20.066 12.513,20.066
  text "+" at -32.766,35.306 h1.27
  text "+" at 32.258,35.306 h1.27
  text "+" at 4.318,-21.59 h1.27
  text "+" at -32.766,-36.068 h1.27
  text "+" at 32.004,-36.068 h1.27
Bottom Solder:
  lines w0.508: -34.539,-33.66 -33.391,-32.512 -32.512,-32.512 -32.258,-32.258 ; -34.539,33.66 -33.391,32.512 -32.512,32.512 -32.258,32.258 ; 32.258,-32.258 32.512,-32.512 33.391,-32.512 34.539,-33.66 ; 32.258,32.258 32.512,32.512 33.391,32.512 34.539,33.66
  lines w0.762: -33.655,-34.544 -31.242,-34.544 -26.67,-29.972 -25.146,-28.448 ; -33.655,34.544 -31.75,34.544 -19.558,22.352 -19.558,16.256 -19.558,2.032 -10.414,-7.112 -9.652,-7.112 -9.652,-17.558 ; -15.748,-1.778 -4.826,-1.778 31.496,34.544 33.655,34.544 ; -13.856,-24.13 -15.126,-25.4 ; -13.176,-17.558 -9.652,-17.558 ; -12.922,-17.558 -9.652,-17.558 ; -9.652,-19.558 -6.096,-23.114 3.048,-23.114 4.064,-22.098 6.858,-22.098 ; -9.652,-17.526 -9.652,-17.558 ; 19.05,22.098 19.05,-21.844 31.75,-34.544 33.655,-34.544 ; -15.126,-25.4 -16.002,-25.4 -15.126,-25.4 ; -15.126,-25.4 -13.97,-24.244 -15.126,-25.4

## Text inside footprints (layer, text, board x,y; h text height)
U1: Top Overlay "JDY-08" at -12.97,-7.012 h1 r90